# Altium PCB PCB.PcbDoc
Units mm, origin at the board's own origin, x right, y up, seen from the top; angles counter-clockwise.
Board outline 100.28 x 45.64 mm, 2 copper layers (Top Layer, Bottom Layer); 57 components, 71 nets, 224 pads, 17 vias.
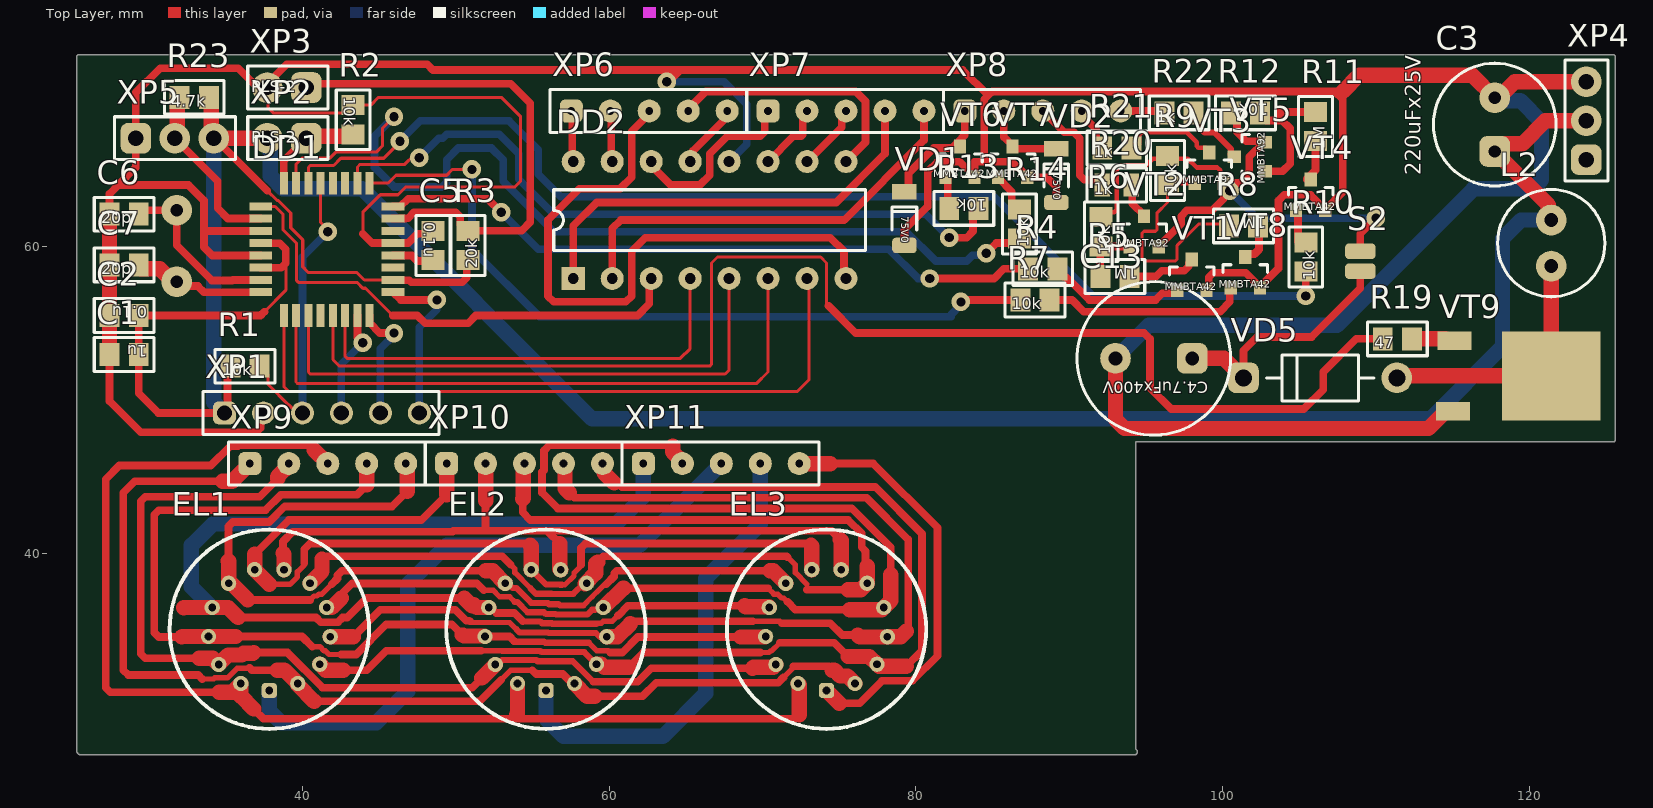
[diagram p0: Top Layer view]
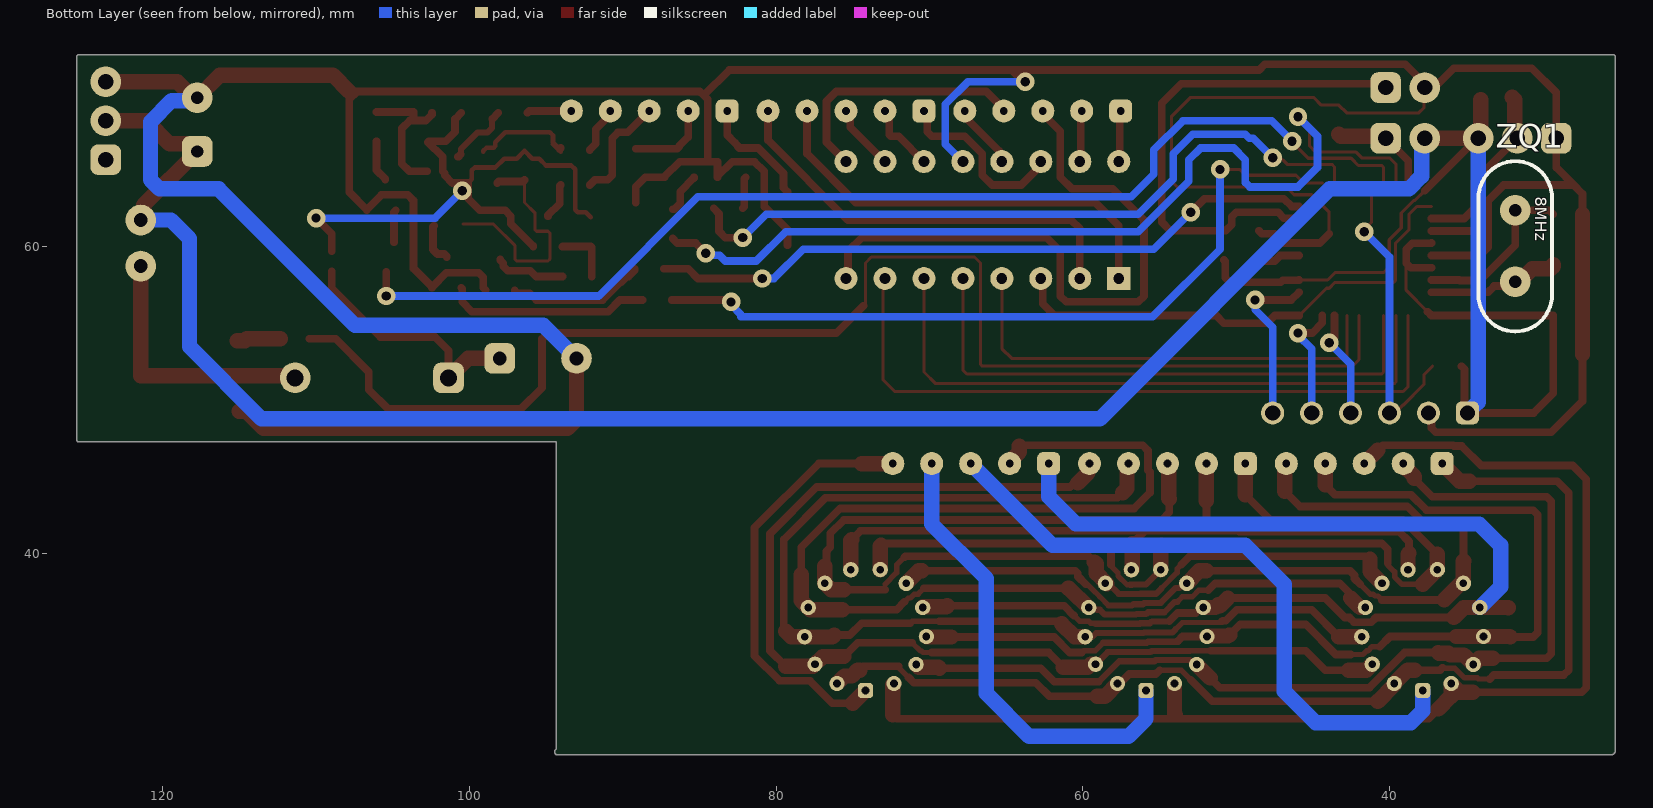
[diagram p1: Bottom Layer view, seen from below]

## Layer stack, top to bottom
Top Solder: solder mask 0.0102, Solder Resist, Dk 3.5
Top Layer: signal copper 0.0356
Dielectric 1: dielectric 0.32, FR-4, Dk 4.8
Bottom Layer: signal copper 0.0356
Bottom Solder: solder mask 0.0102, Solder Resist, Dk 3.5

## Board outline
25.345,26.986 cw(c25.4,27.07) 25.3,27.07 25.3,72.371 cw(c25.4,72.371) 25.3,72.381 cw(c25.4,72.39) 25.4,72.49 125.476,72.49 cw(c125.476,72.39) 125.576,72.39 125.576,47.371 cw(c125.476,47.371) 125.438,47.278 cw(c125.4,47.371) 125.4,47.271 94.334,47.271 94.334,27.224 cw(c94.234,27.051) 94.434,27.051 cw(c94.234,27.051) 94.234,26.851 25.527,26.87 cw(c25.527,27.07)

## Design rules (kind name [scope] priority, off if disabled: settings)
Clearance [All] p1: gap=0.254 ignorepadtopadclearanceinfootprint=FALSE except(0: Arc-Hole Track-Hole SMDPad-Hole THPad-Hole Via-Hole Fill-Hole Poly-Hole Region-Hole Text-Hole; 0.2: Arc-Arc Arc-Track Arc-SMDPad Arc-THPad Arc-Via Arc-Fill Arc-Poly Arc-Region Track-Track Track-SMDPad Track-THPad Track-Via Track-Fill Track-Poly Track-Region)
PolygonConnect [All] p1: connectstyle=Relief reliefconductorwidth=0.254 reliefentries=4 polygonreliefangle="90 Angle" airgapwidth=0.254
RoomDefinition Power [InComponentClass('Power')] p1: confinementstyle=ConfineIn formatcopy=TRUE lockcomponents=FALSE outline 108.712,47.371 125.603,47.371 125.603,72.263 108.712,72.263
RoomDefinition mcu [InComponentClass('mcu')] p2: confinementstyle=ConfineIn formatcopy=TRUE lockcomponents=FALSE outline 25.588,47.498 55.306,47.498 55.306,72.39 25.588,72.39
RoomDefinition Lamps [InComponentClass('Lamps')] p3: confinementstyle=ConfineIn formatcopy=TRUE lockcomponents=FALSE outline 25.344,27.051 82.042,27.051 82.042,47.244 25.344,47.244
RoomDefinition Lamp_C_Unit [InComponentClass('Lamp_C_Unit')] p4: confinementstyle=ConfineIn formatcopy=TRUE lockcomponents=FALSE outline 55.499,55.118 108.458,55.118 108.458,70.485 55.499,70.485
RoutingVias [All] p1: holewidth=0.711 width=1.27 viastyle="Through Hole" minholewidth=0.711 minwidth=1.27 maxholewidth=0.711 maxwidth=1.27
SolderMaskExpansion [All] p1: expansion=0.102 istentingtop=FALSE
Width [All] p1: maxlimit=1 minlimit=0.2 preferedwidth=0.5 minimp=50.000000 maximp=50.000000 favimp=50.000000
30 further rules are at their usual default settings.

## Classes and differential pairs
component class Power: C3 C13 L2 R19 S2 VD5 VT9 XP4
component class mcu: C1 C2 C5 C6 C7 DD1 R1 R2 R3 R23 XP1 XP2 XP3 XP5 ZQ1
component class Lamps: EL1 EL2 EL3 XP9 XP10 XP11
component class Lamp_C_Unit: DD2 R4 R5 R6 R7 R8 R9 R10 R11 R12 R13 R14 R20 R21 R22 VD1 VD2 VT1 VT2 VT3 VT4 VT5 VT6 VT7 VT8 XP6 XP7 XP8

## Components (designator, comment, footprint, x,y, rotation, side; value= is the part's Value field where it differs from the comment)
C1 "1u" CR2012-0805#1 28.382,52.959 r180 top
C2 "0.1u" CR2012-0805#1 28.382,55.499 r180 top
C3 "220uFx25V" C8x11.5 117.729,67.945 r90 top
C5 "0.1u" CR2012-0805#1 48.514,60.071 r270 top
C6 "20p" CR2012-0805#1 28.382,62.103 r0 top
C7 "20p" CR2012-0805#1 28.382,58.801 r0 top
C13 "C4.7uFx400V" C10x16 95.504,52.705 r180 top
DD1 "ATMEGA8-16AU" *QFP80P900X900X120-32N 41.59,59.817 r0 top
DD2 "K155ID1" DIP16 57.658,57.912 r90 top
EL1 "IN-16" IN-16 37.846,35.052 r0 top
EL2 "IN-16" IN-16 55.88,35.052 r0 top
EL3 "IN-16" IN-16 74.168,35.052 r0 top
L2 "1000uH" CHOKE1 121.412,61.722 r270 top
R1 "10k" CR2012-0805#1 36.261,52.197 r0 top
R2 "10k" CR2012-0805#1 43.307,68.26 r270 top
R3 "20k" CR2012-0805#1 50.8,60.071 r90 top
R4 "10k" CR2012-0805#1 88.265,58.547 r0 top
R5 "1M" CR2012-0805#1 92.964,58.039 r180 top
R6 "10k" CR2012-0805#1 92.075,60.96 r90 top
R7 "10k" CR2012-0805#1 87.757,56.515 r0 top
R8 "1M" CR2012-0805#1 101.346,61.341 r180 top
R9 "10k" CR2012-0805#1 96.393,64.958 r90 top
R10 "10k" CR2012-0805#1 105.41,59.309 r90 top
R11 "1M" CR2012-0805#1 106.045,67.818 r90 top
R12 "10k" CR2012-0805#1 101.473,68.707 r180 top
R13 "10k" CR2012-0805#1 83.119,62.484 r180 top
R14 "10k" CR2012-0805#1 86.741,61.468 r90 top
R19 "47" CR2012-0805#1 111.379,53.975 r0 top
R20 "1k" CR2012-0805#2 93.091,64.008 r0 top
R21 "1k" CR2012-0805#1 93.091,66.421 r0 top
R22 "1k" CR2012-0805#1 97.155,68.707 r0 top
R23 "4.7k" CR2012-0805#1 32.954,69.723 r0 top
S2 "JUMP2" JUMP 108.966,59.69 r270 top
VD1 "75V0" SOD-80 79.248,60.071 r90 top
VD2 "75V0" SOD-80 89.154,62.865 r90 top
VD5 "SF18" DO-41 111.346,51.435 r180 top
VT1 "MMBTA42" SOT-23 97.033,57.15 r0 top
VT2 "MMBTA92" SOT-23 93.919,59.976 r0 top
VT3 "MMBTA92" SOT-23 98.171,64.135 r0 top
VT4 "MMBTA42" SOT-23 104.78,62.357 r0 top
VT5 "MMBTA92" SOT-23 102.743,64.902 r90 top
VT6 "MMBTA42" SOT-23 81.92,64.516 r0 top
VT7 "MMBTA42" SOT-23 85.349,64.516 r0 top
VT8 "MMBTA42" SOT-23 100.523,57.309 r0 top
VT9 "FQD10N20" TO-252 115.112,53.862 r270 top
XP1 "ISP" PLS-6 34.925,49.149 r90 top
XP2 "PLS-2" PLS-2 40.259,67.056 r270 top
XP3 "PLS-2" PLS-2 40.259,70.358 r270 top
XP4 "PLS-3" PLS-3 123.698,65.659 r180 top
XP5 "PLS-3" PLS-3 29.144,67.056 r90 top
XP6 "PLS-5" PLS-5 57.531,68.834 r90 top
XP7 "PLS-5" PLS-5 70.358,68.834 r90 top
XP8 "PLS-5" PLS-5 83.185,68.834 r90 top
XP9 "PLS-5" PLS-5 36.576,45.847 r90 top
XP10 "PLS-5" PLS-5 49.403,45.847 r90 top
XP11 "PLS-5" PLS-5 62.23,45.847 r90 top
ZQ1 "8MHz" CRYSTAL 31.811,62.357 r270 bottom

## Footprints (in the part's own frame and the unit in brackets; to place one, negate y for a bottom-side part, rotate by r counter-clockwise, add the part's x,y. Pads: shape width x height; smd on the part's side, far side on the other; paste and mask are expansions set on the pad)
*QFP80P900X900X120-32N [mil]
  rect 58x20 smd: 1(-169.87,110) 2(-169.87,79) 3(-169.87,47) 4(-169.87,16) 5(-169.87,-16) 6(-169.87,-47) 7(-169.87,-79) 8(-169.87,-110) 17(169.87,-110) 18(169.87,-79) 19(169.87,-47) 20(169.87,-16) 21(169.87,16) 22(169.87,47) 23(169.87,79) 24(169.87,110)
  rect 20x58 smd: 9(-110,-169.87) 10(-79,-169.87) 11(-47,-169.87) 12(-16,-169.87) 13(16,-169.87) 14(47,-169.87) 15(79,-169.87) 16(110,-169.87) 25(110,169.87) 26(79,169.87) 27(47,169.87) 28(16,169.87) 29(-16,169.87) 30(-47,169.87) 31(-79,169.87) 32(-110,169.87)
C8x11.5 [mm]
  rrect50% 2x2 hole 0.8: 1(-1.75,0)
  round 2 hole 0.8: 2(1.75,0)
  silkscreen extent -4,-4 4,4
C10x16 [mm]
  rrect50% 2x2 hole 0.9: 1(-2.5,0)
  round 2 hole 0.9: 2(2.5,0)
  silkscreen extent -5,-5 5,5
CHOKE1 [mm]
  round 2 hole 0.9: 1(0,0) 2(3,0)
  silkscreen extent -2,-3.5 5,3.5
CR2012-0805#1 [mm]
  rect 1.3x1.5 smd: 1(-0.95,0) 2(0.95,0)
  silkscreen extent -1.95,-1.1 1.95,1.1
CR2012-0805#2 [mm]
  rect 1x1.5 smd: 1(-0.95,0) 2(0.95,0)
  silkscreen extent -1.95,-1.1 1.95,1.1
CRYSTAL [mm]
  round 2 hole 0.8: 1(0,0) 2(4.65,0)
  silkscreen extent -3.2,-2.4 7.9,2.4
DIP16 [mm]
  rect 1.5x1.5 hole 0.7: 1(0,0)
  round 1.5 hole 0.7: 2(0,-2.54) 3(0,-5.08) 4(0,-7.62) 5(0,-10.16) 6(0,-12.7) 7(0,-15.24) 8(0,-17.78) 9(7.62,-17.78) 10(7.62,-15.24) 11(7.62,-12.7) 12(7.62,-10.16) 13(7.62,-7.62) 14(7.62,-5.08) 15(7.62,-2.54) 16(7.62,0)
  silkscreen extent 1.84,-19.05 5.78,1.27
DO-41 [mm]
  round 2 hole 1.1: 1(0,0)
  rrect50% 2x2 hole 1.1: 2(10,0)
  silkscreen extent 1.5,-1.5 8.5,1.5
IN-16 [mm]
  rrect50% 1x1 hole 0.5: 1(0,-4)
  round 1 hole 0.5: 2(-1.857,-3.544) 3(-3.3,-2.3) 4(-3.97,-0.479) 5(-3.727,1.411) 6(-2.656,2.989) 7(-0.961,3.883) 8(0.954,3.871) 9(2.647,2.99) 10(3.735,1.41) 11(3.967,-0.493) 12(3.29,-2.284) 13(1.857,-3.542)
  silkscreen extent -6.5,-6.5 6.5,6.5
JUMP [mm]
  rrect50% 1x2 smd: 1(0,0) 2(1.3,0)
PLS-2 [mm]
  rrect50% 2x2 hole 1: 1(0,0)
  round 2 hole 1: 2(0,-2.54)
  silkscreen extent -1.4,-3.82 1.4,1.4
PLS-3 [mm]
  rrect50% 2x2 hole 1: 1(0,0)
  round 2 hole 1: 2(0,-2.54) 3(0,-5.08)
  silkscreen extent -1.4,-6.5 1.4,1.4
PLS-5 [mm]
  rrect50% 1.5x1.5 hole 0.5: 1(0,0)
  round 1.5 hole 0.5: 2(0,-2.54) 3(0,-5.08) 4(0,-7.62) 5(0,-10.16)
  silkscreen extent -1.4,-11.44 1.4,1.4
PLS-6 [mm]
  rrect50% 1.5x1.5 hole 1: 1(0,0)
  round 1.5 hole 1: 2(0,-2.54) 3(0,-5.08) 4(0,-7.62) 5(0,-10.16) 6(0,-12.7)
  silkscreen extent -1.4,-13.97 1.4,1.4
SOD-80 [mm]
  rrect50% 1x1.6 smd: 1(0,0)
  rect 1x1.6 smd: 2(3.5,0)
  silkscreen extent 1,-0.8 2.5,0.8
SOT-23 [mm]
  rect 0.8x0.9 smd: 1(0,0) 2(1.9,0) 3(0.95,2)
  silkscreen extent -0.5,1 2.4,1.5
TO-252 [mm]
  rect 1.2x2.2 smd: 1(0,0) 2(4.6,-0.1)
  rect 5.8x6.4 smd: 3(2.3,6.3)

## Part data
C1: library part C0805-1u-X7R
C2 C5: library part C0805-0.1u-X7R
C3: library part "C220uFx25V YAGEO SY", "SY025M0220A3F-0811"
C6 C7: library part C0805-20p-NPO
DD1: "AVR AVRВ® ATmega Microcontroller IC 8-Bit 16MHz 8KB _4K x 16_ FLASH 32-TQFP _7x7_", Package="TQFP-32 Microchip Technology", Availability=Unavailable, MF="Microchip Technology", MP=ATMEGA8-16AU, Price=None, SnapEDA_Link=https://www.snapeda.com/parts/ATMEGA8-16AU/Microchip/view-part/4246640/?ref=snap
L2: library part CHOKE_1
R1 R2 R4 R5 R6 R7 R8 R9 R10 R11 R12 R13 R14: library part R0805-10k-5%
R3: library part R0805-20k-5%
R19: library part R0805-47R-5%
R20 R21 R22: library part R0805-1k-5%
R23: library part R0805-4k7-5%
VD1 VD2: library part BZV55-C20V0
ZQ1: library part Crystal_8MHz

## Via types
v1: diameter 1.2, hole 0.6, Top Layer to Bottom Layer, 17 vias

## Nets (pads, with @x,y where several pads share a name; then routed paths per layer and width w, separated by ;. In a path a pad name is that pad's centre, name@x,y a point inside that pad or via, vN(x,y) a via of type N, cw(c..) or ccw(c..) an arc to the next point about the centre after c; other vN are vias at no path point)
1: DD1.1 DD2.3 | length 32.7
  Top Layer w0.2: DD1.1 38.227,62.611 38.735,62.103 38.735,61.087 39.624,60.198 39.624,57.775 39.741,57.658 43.561,57.658 43.942,57.277 44.119,57.277 45.897,55.499
  Top Layer w0.5: 45.897,55.499 47.498,55.499 48.006,54.991 50.8,54.991 51.308,55.499 61.849,55.499 62.611,56.261 62.611,57.785 DD2.3
2: DD1.10 DD2.6 | length 41.6
  Top Layer w0.2: DD1.10 39.583,51.171 39.701,51.054 69.596,51.054 70.358,51.816 DD2.6
4: DD1.9 DD2.7 | length 46
  Top Layer w0.2: DD1.9 38.796,50.866 39.116,50.546 72.263,50.546 73.025,51.308 73.025,57.785 DD2.7
8: DD1.14 DD2.4 | length 30
  Top Layer w0.2: DD1.14 42.784,52.847 42.926,52.705 64.643,52.705 65.278,53.34 DD2.4
+5V: C1.1 C2.1 C3.1 DD1.4 DD1.6 DD1.18 L2.1 R1.1 R3.1 R23.2 XP1.1 XP2.2 XP4.2 XP5.3 | length 196.2
  Top Layer w0.2: 37.526,55.753 38.923,57.15 38.923,58.916 ; 37.719,63.627 38.354,62.992 38.429,62.992 39.243,62.178 39.243,61.214 40.024,60.433 40.024,58.673 40.404,58.293 43.561,58.293 44.044,57.81 DD1.18
  Top Layer w0.5: R23.2 34.054,69.573 34.064,69.563 34.064,67.216 34.13,67.216 34.29,67.056 37.719,63.627 ; R1.1 35.118,52.004 35.118,49.342 XP1.1 30.607,49.149 29.332,50.424 C1.1 C2.1 37.272,55.499 37.526,55.753 ; DD1.6 38.63,58.623 38.923,58.916 38.923,59.817 38.521,60.219 37.279,60.219 DD1.4 ; DD1.18 45.909,57.806 46.969,57.806 47.117,57.658 50.419,57.658 50.712,57.951 50.712,59.033 R3.1
  Top Layer w1: R23.2@34.054,69.573 34.054,67.226 34.064,67.216 XP5.3 34.29,67.056 XP2.2 ; L2.1 121.221,61.913 121.221,62.703 C3.1 118.229,66.695 119.527,66.695 121.031,68.199 XP4.2
  Bottom Layer w1: XP5.3 34.224,49.85 XP1.1 ; XP2.2 37.91,66.865 37.91,64.579 38.735,63.754 43.907,63.754 58.893,48.768 113.538,48.768 118.237,53.467 118.237,60.516 119.443,61.722 L2.1
+180V: R6.2 R9.2 R12.2 S2.1 VT2.2 VT3.2 VT5.2 | length 40.1
  Top Layer w0.3: R6.2 92.395,62.23 92.915,62.23 93.091,62.406 93.091,65.024 93.345,65.278 94.996,65.278 95.446,65.728 95.893,65.728 96.393,66.228 96.893,65.728 97.721,65.728 98.298,65.151 99.646,65.151 99.822,64.975 99.822,64.384 VT3.2
  Top Layer w0.5: VT2.2 95.819,60.026 97.282,61.489 97.282,61.976 97.663,62.357 99.314,62.357 100.071,63.114 100.071,63.627 VT3.2 101.092,64.135 101.6,64.643 101.6,64.77 101.727,64.897 101.727,65.836 102.693,66.802 102.636,66.859 101.543,66.859 100.923,67.479 100.923,68.307 R12.2 ; S2.1 108.966,60.833 v1(109.982,61.849)
  Bottom Layer w0.5: v1(100.457,63.627) 102.235,61.849 v1(109.982,61.849)
A_0: R20.1 XP8.3 | length 7.3
  Top Layer w0.5: XP8.3 89.662,67.437 90.297,67.437 90.678,67.056 90.678,64.643 90.971,64.35 91.799,64.35 R20.1
A_0_0: EL1.1 XP11.3 | length 42.2
  Bottom Layer w1: EL1.1 37.846,29.718 38.608,28.956 44.831,28.956 46.863,30.988 46.863,37.973 49.403,40.513 61.976,40.513 XP11.3
A_1: R21.1 XP8.4 | length 3.1
  Top Layer w0.5: XP8.4 90.805,68.585 91.741,67.649 91.741,66.694 R21.1@92.141,66.294
A_1_0: EL2.1 XP11.4 | length 30.3
  Bottom Layer w1: EL2.1 55.88,29.21 57.023,28.067 63.5,28.067 66.294,30.861 66.294,38.354 69.85,41.91 XP11.4
A_2: R22.1 XP8.5 | length 2.9
  Top Layer w0.5: XP8.5 96.078,68.834 R22.1
A_2_0: EL3.1 XP11.5 | length 28
  Top Layer w0.5: 74.422,45.847 77.216,45.847 81.407,41.656 81.407,33.327 79.769,31.689 77.79,31.689 76.327,30.226 74.994,30.226
  Top Layer w1: XP11.5 74.422,45.847 ; EL3.1@74.231,31.052 EL3.1 74.994,30.226
DS_0: DD1.2 R23.1 XP5.2 | length 11.6
  Top Layer w0.5: XP5.2 34.478,64.262 34.478,62.484 35.138,61.824 DD1.2
  Top Layer w1: XP5.2 31.854,67.226 31.854,69.573 R23.1
L_0: DD2.16 XP6.1 | length 3.4
  Top Layer w0.5: XP6.1 57.594,68.77 57.594,65.596 DD2.16
L_0_0: EL1.13 EL2.13 EL3.13 XP9.1 | length 72.7
  Top Layer w0.2: 72.009,32.549 72.009,32.639
  Top Layer w0.35: 33.478,31.8 34.215,31.8 34.292,31.877 35.12,31.877 35.741,32.498 36.418,32.498 36.451,32.531 36.557,32.531 ; 52.959,31.75 53.594,32.385 54.991,32.385 ; 71.361,31.901 72.009,32.549
  Top Layer w0.5: 33.478,31.8 33.21,32.068 28.638,32.068 28.321,32.385 28.321,43.942 29.083,44.704 34.798,44.704 ; 36.557,32.531 36.703,32.385 38.354,32.385 ; 40.767,30.353 51.562,30.353 52.959,31.75 ; 54.991,32.385 55.245,32.131 56.981,32.131 57.602,31.51 EL2.13 ; 59.055,30.678 62.174,30.678 63.058,31.562 71.022,31.562 71.361,31.901 ; 72.009,32.639 74.295,32.639 74.549,32.385
  Top Layer w1: 34.798,44.704 35.433,44.704 XP9.1 ; 38.354,32.385 38.828,32.385 EL1.13 39.703,31.417 40.767,30.353 ; EL2.13 58.569,30.678 59.055,30.678 ; 74.549,32.385 74.679,32.385 75.06,32.004 75.531,32.004 EL3.13
L_1: DD2.15 XP6.2 | length 3.4
  Top Layer w0.5: XP6.2 60.134,68.77 60.134,65.596 DD2.15
L_1_0: EL1.2 EL2.2 EL3.2 XP9.3 | length 81.1
  Top Layer w0.5: 34.592,30.94 27.471,30.94 27.178,31.233 27.178,44.831 28.067,45.72 34.036,45.72 35.306,46.99 35.802,46.99 35.859,47.047 40.456,47.047 40.767,46.736 ; 36.83,29.845 37.465,29.21 53.721,29.21 ; 53.975,29.464 53.721,29.21 ; 72.39,29.464 72.136,29.21 53.721,29.21
  Top Layer w1: 34.592,30.94 35.421,30.94 EL1.2 35.989,30.686 36.83,29.845 ; 40.767,46.736 XP9.3 ; 53.975,29.464 54.023,29.512 EL2.2 ; EL3.2 72.39,31.429 72.39,29.464
L_2: DD2.8 XP6.3 | length 41.7
  Top Layer w0.5: XP6.3 62.611,68.645 61.468,67.502 61.468,64.516 60.706,63.754 58.039,63.754 56.007,61.722 56.007,56.769 56.388,56.388 61.087,56.388 61.468,56.769 61.468,59.69 62.357,60.579 74.422,60.579 75.311,59.69 75.311,58.039 DD2.8 DD2.8@75.565,58.039
L_2_0: EL1.9 EL2.9 EL3.9 XP10.3 | length 71
  Top Layer w0.2: 72.898,37.628 72.898,37.973
  Top Layer w0.35: 53.594,39.243 53.848,38.989 53.848,38.735 54.864,37.719 ; 71.628,39.751 72.136,39.243 72.136,38.735 72.898,37.973
  Top Layer w0.4: 54.864,37.719 55.223,37.36 56.245,37.36 56.257,37.347 57.67,37.347 58.365,38.042 EL2.9@58.457,38.042
  Top Layer w0.5: 41.275,39.624 41.463,39.812 53.025,39.812 53.594,39.243 ; 54.356,43.561 54.356,42.672 54.864,42.164 75.591,42.164 76.454,41.301 76.454,40.386 76.708,40.132 76.708,39.27 76.815,39.162 ; 59.245,39.433 59.624,39.812 71.567,39.812 71.628,39.751 ; 72.898,37.628 75.572,37.628
  Top Layer w1: EL1.9 41.275,38.824 41.275,39.624 ; 54.356,43.561 54.392,43.597 54.392,45.756 XP10.3 ; EL2.9@58.424,38.01 58.457,38.042 59.118,38.704 59.118,39.306 59.245,39.433 ; 75.572,37.628 76.4,37.628 EL3.9 76.815,39.162
L_3: DD2.9 XP6.4 | length 16.9
  Top Layer w0.5: XP6.4 65.151,68.961 66.294,70.104 76.073,70.104 76.708,69.469 76.708,66.802 DD2.9
L_3_0: EL1.4 EL2.4 EL3.4 XP9.4 | length 66.1
  Top Layer w0.2: 59.944,33.655 60.071,33.528
  Top Layer w0.35: 40.64,33.909 41.148,33.909 41.414,33.643 41.498,33.643 41.74,33.401 42.545,33.401 ; 58.674,34.163 59.182,33.655 59.944,33.655
  Top Layer w0.4: 53.793,34.235 55.757,34.235 55.829,34.163 58.674,34.163
  Top Layer w0.5: 32.131,34.544 30.646,34.544 30.353,34.837 30.353,42.506 30.646,42.799 37.592,42.799 38.608,43.815 43.561,43.815 44.196,44.45 ; 35.658,34.573 39.976,34.573 40.64,33.909 ; 42.545,33.401 43.508,33.401 45.466,35.359 49.731,35.359 50.419,34.671 ; EL2.4 53.505,34.573 53.793,34.285 ; 60.071,33.528 60.853,33.528 61.869,34.544 68.58,34.544
  Top Layer w1: 32.131,34.544 32.16,34.573 EL1.4 35.658,34.573 ; 44.196,44.45 XP9.4 ; 50.419,34.671 50.472,34.671 50.533,34.61 51.872,34.61 EL2.4 ; 68.58,34.544 EL3.4@70.161,34.544
L_4: DD2.13 XP6.5 | length 4.3
  Top Layer w0.5: DD2.13 65.469,65.723 65.469,66.231 67.691,68.453 XP6.5
L_4_0: EL1.6 EL2.6 EL3.6 XP9.5 | length 59
  Top Layer w0.2: 59.817,37.899 59.817,37.973
  Top Layer w0.35: 40.513,36.957 40.767,37.211 40.958,37.211 41.084,37.337 41.274,37.337 41.91,37.973 ; 58.32,36.603 58.884,37.167 58.89,37.167 59.402,37.68 59.402,37.685 59.717,38 60.325,38.608
  Top Layer w0.4: EL2.6 53.387,38.041 53.687,37.741 53.943,37.741 54.924,36.76 55.996,36.76 56.075,36.681 56.705,36.681 56.784,36.603 58.32,36.603
  Top Layer w0.5: 35.179,39.497 35.179,41.744 35.472,42.037 37.846,42.037 38.862,43.053 45.847,43.053 46.832,44.038 ; 36.449,36.957 40.513,36.957 ; 41.91,37.973 42.291,38.354 42.291,38.569 42.584,38.862 51.943,38.862 ; 59.817,37.973 60.325,38.481 60.325,38.696 60.491,38.862 70.485,38.862
  Top Layer w1: 35.179,39.497 35.19,39.486 EL1.6 35.365,38.041 36.449,36.957 ; XP9.5 46.832,45.751 46.832,44.038 ; 51.943,38.862 52.403,38.862 EL2.6 ; 70.485,38.862 70.691,38.862 EL3.6
L_5: DD2.14 XP7.1 | length 11.9
  Top Layer w0.5: DD2.14 62.738,65.278 64.008,64.008 65.913,64.008 66.548,64.643 66.548,66.04 67.691,67.183 69.85,67.183 70.143,67.476 70.143,68.619 XP7.1
L_5_0: EL1.7 EL2.7 EL3.7 XP10.1 | length 61.5
  Top Layer w0.2: 40.132,39.124 40.132,39.37 ; 58.166,39.179 58.166,39.243
  Top Layer w0.35: 37.846,37.973 39.186,37.973 39.675,38.461 39.675,38.786 40.132,39.243 ; 56.935,37.947 57.124,37.947 57.709,38.532 57.709,38.721 58.166,39.179
  Top Layer w0.4: EL2.7@55.054,38.935 55.054,38.8 55.894,37.96 56.79,37.96 56.803,37.947 56.935,37.947
  Top Layer w0.5: 36.885,39.933 39.116,42.164 47.752,42.164 49.403,43.815 ; 40.132,39.37 40.132,40.259 40.513,40.64 54.737,40.64 54.864,40.513 ; EL2.7 EL2.7@55.054,38.935 ; 58.166,39.243 58.166,40.347 58.459,40.64 73.025,40.64 73.152,40.513
  Top Layer w1: 36.885,39.933 EL1.7 37.846,37.974 37.846,37.973 ; 49.403,43.815 XP10.1 ; 54.864,40.513 54.919,40.458 EL2.7 ; 73.152,40.513 73.207,40.458 EL3.7
L_6: DD2.11 XP7.2 | length 4.7
  Top Layer w0.5: DD2.11 72.009,67.183 72.517,67.183 72.611,67.277 72.611,68.547 XP7.2
L_6_0: EL1.8 EL2.8 EL3.8 XP10.2 | length 48
  Top Layer w0.5: 38.735,40.005 38.735,40.767 39.37,41.402 49.787,41.402 49.848,41.463 51.816,41.463 ; 51.943,43.434 51.943,41.59 51.816,41.463 ; 56.769,40.64 56.007,41.402 ; 75.057,40.894 74.488,41.463 56.172,41.463 56.111,41.402 56.007,41.402 ; 51.816,41.463 55.946,41.463 56.007,41.402
  Top Layer w1: 38.735,40.005 38.8,39.94 EL1.8 ; 51.943,43.434 XP10.2 ; 56.769,40.64 56.769,38.988 EL2.8 ; 75.057,40.894 75.122,40.829 EL3.8
L_7: DD2.10 XP7.3 | length 4.4
  Top Layer w0.5: DD2.10 75.151,67.785 75.151,68.547 XP7.3
L_7_0: EL1.3 EL2.3 EL3.3 XP9.2 | length 65.5
  Top Layer w0.4: EL2.3 52.742,32.752 53.025,33.035 55.26,33.035 55.332,32.963 57.628,32.963 58.963,31.628
  Top Layer w0.5: 33.274,33.147 29.757,33.147 29.464,33.44 29.464,43.395 29.757,43.688 37.211,43.688 38.394,44.871 ; 36.83,33.528 39.029,33.528 41.315,31.242 51.07,31.242 51.697,31.869 ; 58.963,31.628 61.854,31.628 62.738,32.512 69.342,32.512
  Top Layer w1: 33.274,33.147 34.151,33.147 EL1.3 35.167,33.373 36.055,33.373 36.164,33.481 36.783,33.481 36.83,33.528 ; 38.394,44.871 38.394,44.99 39.116,45.712 XP9.2 ; 51.697,31.869 EL2.3 ; 69.342,32.512 69.408,32.578 70.694,32.578 EL3.3
L_8: DD2.1 XP7.4 | length 28.5
  Top Layer w0.5: DD2.1 57.658,61.341 59.182,62.865 74.803,62.865 77.978,66.04 XP7.4
L_8_0: EL1.11 EL2.11 EL3.11 XP10.4 | length 71
  Top Layer w0.2: 71.12,35.56 71.247,35.433 ; 79.375,34.925 79.502,35.052
  Top Layer w0.35: 50.927,35.56 51.002,35.485 53.512,35.485 53.952,35.045 ; 69.342,35.56 71.12,35.56
  Top Layer w0.4: 53.952,35.045 54.162,34.835 56.006,34.835 56.038,34.803 59.136,34.803 EL2.11@59.394,34.544
  Top Layer w0.5: 43.307,34.544 45.085,36.322 49.964,36.322 50.678,35.609 50.878,35.609 50.927,35.56 ; 57.404,43.942 57.723,43.623 76.773,43.623 79.502,40.894 79.502,35.052 ; 61.341,35.433 61.468,35.56 69.342,35.56 ; 71.247,35.433 74.422,35.433 75.184,34.671 76.2,34.671
  Top Layer w1: EL1.11 43.292,34.559 43.307,34.544 ; XP10.4 57.119,45.751 57.119,44.227 57.404,43.942 ; EL2.11 60.541,34.559 61.378,35.396 ; 76.2,34.671 76.327,34.544 78.12,34.544 EL3.11 79.009,34.559 79.375,34.925
L_9: DD2.2 XP7.5 | length 27.9
  Top Layer w0.5: DD2.2 60.198,61.175 60.745,61.722 75.311,61.722 80.518,66.929 XP7.5
L_9_0: EL1.12 EL2.12 EL3.12 XP10.5 | length 72.6
  Top Layer w0.35: 51.664,33.655 52.878,33.655 ; 69.85,33.528 70.407,33.528 70.506,33.627 70.584,33.627 71.12,34.163
  Top Layer w0.4: 53.005,33.635 55.509,33.635 55.581,33.563 58.375,33.563 EL2.12 ; EL2.12@59.487,32.768 59.677,32.578
  Top Layer w0.5: 42.672,32.385 44.196,32.385 45.466,33.655 51.664,33.655 ; 60.325,44.577 60.579,44.577 60.833,44.323 77.343,44.323 80.391,41.275 80.391,33.655 79.375,32.639 ; 61.28,32.578 62.23,33.528 69.85,33.528 ; 71.12,34.163 74.676,34.163 75.565,33.274
  Top Layer w1: EL1.12 41.519,32.385 42.672,32.385 ; EL2.12 EL2.12@59.487,32.768 ; XP10.5 59.659,45.751 59.659,45.243 60.325,44.577 ; 59.677,32.578 61.28,32.578 ; 75.565,33.274 76.952,33.274 EL3.12 77.587,32.639 79.375,32.639
L_point: DD1.26 R13.1 | length 47.3
  Top Layer w0.2: DD1.26 43.597,65.187 43.762,65.352 46.683,65.352 v1@47.244,65.913
  Top Layer w0.5: v1(82.169,60.579) 83.312,60.579 83.717,60.984 83.717,62.132 R13.1
  Bottom Layer w0.5: v1(47.625,65.786) 48.895,67.056 49.149,67.056 49.403,67.31 52.832,67.31 54.102,66.04 54.102,64.389 56.388,62.103 80.645,62.103 v1(82.169,60.579)
Lamp_0: DD1.24 R4.1 | length 44
  Top Layer w0.5: DD1.24 46.387,62.611 46.895,63.119 52.07,63.119 v1(52.959,62.23) ; v1(80.899,57.912) 85.09,57.912 85.725,58.547 R4.1
  Bottom Layer w0.5: v1(52.959,62.23) 55.372,59.817 78.232,59.817 80.137,57.912 v1(80.899,57.912)
Lamp_1: DD1.25 R7.1 | length 50.7
  Top Layer w0.2: DD1.25 45.59,64.132 46.101,64.643 49.403,64.643 49.784,65.024 v1(51.054,65.024)
  Top Layer w0.5: v1@82.804,56.261 v1(82.931,56.388) 83.058,56.515 R7.1
  Bottom Layer w0.5: v1(51.054,65.024) 51.054,59.817 55.46,55.411 82.296,55.411 82.296,55.564 82.931,56.199 v1(82.931,56.388)
Lamp_2: DD1.30 R10.1 | length 74.7
  Top Layer w0.2: DD1.30 40.396,65.161 40.513,65.278 42.037,65.278 42.511,65.752 45.305,65.752 46.355,66.802 v1(46.355,66.865) v1@46.355,66.929
  Top Layer w0.5: v1(105.41,56.769) R10.1
  Bottom Layer w0.5: v1(46.355,66.865) 47.688,68.199 53.467,68.199 55.372,66.294 55.372,64.709 56.835,63.246 85.09,63.246 91.567,56.769 v1(105.41,56.769)
Left_P: VD1.2 VT6.3 XP8.1 | length 7.6
  Top Layer w0.5: VD1.2 79.264,63.571 79.514,63.821 79.514,64.782 81.153,66.421 82.389,66.421 82.484,66.516 82.484,66.566 82.677,66.759 83.185,67.267 XP8.1
Left_P_0: EL1.5 EL2.5 EL3.5 XP11.1 | length 77.5
  Top Layer w0.35: 59.169,35.403 59.2,35.433 59.484,35.433 59.611,35.56 60.198,35.56 60.579,35.941
  Top Layer w0.4: 54.356,35.56 55.499,35.56 55.624,35.435 56.254,35.435 56.287,35.403 59.169,35.403
  Top Layer w0.5: 35.814,35.814 40.886,35.814 41.188,35.512 42.317,35.512 42.619,35.814 42.926,35.814 44.196,37.084 50.546,37.084 ; 51.071,36.559 51.272,36.559 ; 52.641,36.11 53.806,36.11 54.356,35.56 ; 60.579,35.941 61.214,36.576 68.834,36.576
  Top Layer w1: 32.258,36.449 32.272,36.463 EL1.5 35.165,36.463 35.814,35.814 ; 50.546,37.084 51.071,36.559 ; 51.172,36.659 51.272,36.559 51.367,36.463 EL2.5 ; 68.834,36.576 68.9,36.51 70.394,36.51 EL3.5
  Bottom Layer w1: EL1.5 32.766,37.816 32.766,40.513 34.163,41.91 60.452,41.91 62.23,43.688 XP11.1
NetC5_2: C5.2 DD1.20 | length 2.8
  Top Layer w0.5: DD1.20 47.142,59.411 47.498,59.055 48.448,59.055 C5.2
NetC6_2: C6.2 DD1.7 ZQ1.1 | length 11.3
  Top Layer w0.5: C6.2 29.586,62.357 ZQ1.1 31.811,60.071 34.097,57.785 35.432,57.785 35.457,57.81 DD1.7
NetC7_2: C7.2 DD1.8 ZQ1.2 | length 8.7
  Top Layer w0.5: ZQ1.2 32.098,57.42 33.192,57.42 33.589,57.023 DD1.8
  Top Layer w1: C7.2 29.332,58.701 29.482,58.551 30.696,58.551 31.54,57.707 ZQ1.2
NetC13_1: C13.1 S2.2 VD5.2 | length 16.1
  Top Layer w0.5: VD5.2 101.346,53.213 102.235,54.102 105.791,54.102 108.966,57.277 S2.2
  Top Layer w1: C13.1@97.973,52.705 100.076,52.705 VD5.2
NetDD1_15: DD1.15 XP1.4 | length 7.4
  Top Layer w0.5: XP1.4 XP1.4@42.545,49.42 ; DD1.15@43.601,55.498 DD1.15 43.597,54.066 v1(43.942,53.721)
  Bottom Layer w0.5: XP1.4 42.545,52.324 v1(43.942,53.721)
NetDD1_16: DD1.16 XP1.5 | length 7.9
  Top Layer w0.5: DD1.16 44.384,55.02 45.048,54.356 v1(45.974,54.356)
  Bottom Layer w0.5: XP1.5 45.085,53.336 45.974,54.225 v1(45.974,54.356)
NetDD1_17: DD1.17 XP1.6 | length 10.9
  Top Layer w0.5: DD1.17 46.413,56.515 v1(48.768,56.515)
  Bottom Layer w0.5: XP1.6 47.625,54.737 48.768,55.88 v1(48.768,56.515)
NetDD1_23: DD1.23 R3.2 XP3.1 | length 33.2
  Top Layer w0.5: XP3.1 40.513,70.612 53.594,70.612 54.864,69.342 54.864,61.595 54.29,61.021 R3.2 50.7,61.021 50.3,61.421 50.3,61.937 50.007,62.23 47.269,62.23 46.888,61.849 46.736,61.849 46.715,61.828 45.909,61.828 DD1.23
NetDD1_29: DD1.29 R1.2 XP1.3 | length 20.3
  Top Layer w0.2: R1.2 37.761,51.647 37.761,51.012 39.116,49.657 39.145,49.657 39.653,49.149 XP1.3 ; DD1.29 41.184,61.577 41.656,61.105 v1(41.656,60.96)
  Bottom Layer w0.5: XP1.3 40.005,59.309 v1(41.656,60.96)
NetDD1_32: DD1.32 R2.2 XP2.1 | length 6.7
  Top Layer w0.5: DD1.32 38.796,65.593 XP2.1
  Top Layer w1: XP2.1 40.386,67.183 43.18,67.183 R2.2
NetL2_2: L2.2 VD5.1 VT9.3 | length 17.3
  Top Layer w1: VD5.1 111.473,51.562 VT9.3 L2.2
NetR4_2: R4.2 VT1.1 | length 9
  Top Layer w0.5: R4.2 89.215,58.447 89.615,58.047 89.715,58.047 90.104,57.658 90.145,57.658 91.288,56.515 95.631,56.515 96.066,56.95 96.883,56.95 97.033,57.1 VT1.1
NetR5_1: R5.1 VT1.3 | length 4.7
  Top Layer w0.5: R5.1 95.631,58.039 96.012,58.42 97.497,58.42 97.79,58.713 97.79,58.907 97.983,59.1 VT1.3
NetR5_2: R5.2 R6.1 VT2.1 | length 3.9
  Top Layer w0.5: R5.2 92.014,59.949 R6.1 92.092,59.993 93.902,59.993 VT2.1 VT2.1@93.916,59.973
NetR7_2: R7.2 VT8.1 | length 13.3
  Top Layer w0.5: R7.2 90.17,56.515 90.932,55.753 99.822,55.753 100.457,56.388 100.457,57.243 VT8.1
NetR8_1: R8.1 VT8.3 | length 2.7
  Top Layer w0.5: VT8.3 101.473,59.359 101.623,59.509 102.069,59.509 102.362,59.802 102.362,61.275 R8.1
NetR8_2: R8.2 R9.1 VT3.1 | length 15.4
  Top Layer w0.2: R9.1@96.393,64.328 96.393,62.865 95.725,62.197 95.725,61.109 95.608,60.992 94.859,60.992 94.742,60.875 94.742,59.172 94.859,59.055 96.901,59.055 97.028,59.182 97.028,60.071 98.425,61.468 R8.2@100.396,61.468
  Top Layer w0.5: R9.1@96.393,64.328 96.49,64.231 98.075,64.231 VT3.1
NetR10_2: R10.2 VT4.1 | length 2.1
  Top Layer w0.5: VT4.1 104.902,62.235 R10.2@104.902,60.286
NetR11_1: R11.1 VT4.3 | length 2.7
  Top Layer w0.5: VT4.3@105.471,64.357 105.471,64.407 106.045,64.981 R11.1
NetR11_2: R11.2 R12.1 VT5.1 | length 9.6
  Top Layer w0.5: R12.1 102.423,68.607 102.823,68.207 103.632,68.207 ; VT5.1 103.891,64.902 104.394,65.405 104.394,67.691 103.878,68.207 103.632,68.207 ; R11.2 103.632,68.768 103.632,68.207
NetR13_2: R13.2 VT6.1 | length 2.1
  Top Layer w0.5: VT6.1@81.976,64.516 82.073,64.42 82.073,62.58 R13.2
NetR14_2: R14.2 VT7.1 | length 2.7
  Top Layer w0.5: VT7.1 85.349,64.466 86.241,63.574 86.241,62.818 86.641,62.418 R14.2
NetR19_2: R19.2 VT9.1 | length 2.8
  Top Layer w1: R19.2 114.499,53.975 114.612,53.862 VT9.1
NetR20_2: R20.2 VT2.3 | length 2.4
  Top Layer w0.5: R20.2 94.107,63.942 94.107,62.788 94.869,62.026 VT2.3
NetR21_2: R21.2 VT3.3 | length 7.1
  Top Layer w0.3: R21.2@94.041,66.167 R21.2@94.541,66.667 ; R21.2@94.168,66.421 94.541,66.794 94.541,67.236 94.742,67.437 97.663,67.437 98.298,66.802 98.298,66.548 98.411,66.435 98.871,66.435 99.075,66.232 VT3.3@99.075,66.182
  Top Layer w0.5: R21.2 R21.2@94.107,66.355
NetR22_2: R22.2 VT5.3 | length 4.3
  Top Layer w0.4: R22.2@98.505,68.307 98.505,67.738 98.806,67.437 99.441,67.437 100.543,66.335 VT5.3@100.543,66.002
  Top Layer w0.5: R22.2 R22.2@98.505,68.307 ; VT5.3@100.543,66.002 100.693,65.852 VT5.3
PWM_1: DD1.13 R19.1 | length 88.4
  Top Layer w0.2: DD1.13 41.996,52.619 42.418,52.197 66.558,52.197 66.675,52.314 66.675,58.928 67.056,59.309 73.787,59.309 74.168,58.928 74.168,56.261 74.295,56.134
  Top Layer w0.5: 74.295,56.134 76.073,54.356 94.869,54.356 95.25,53.975 95.25,50.8 96.647,49.403 105.283,49.403 106.553,50.673 106.553,51.816 108.712,53.975 R19.1
R_point: DD1.31 R14.1 | length 62.4
  Top Layer w0.2: DD1.31 39.583,65.364 39.975,65.756 41.783,65.756 42.179,66.152 44.816,66.152 45.212,66.548 45.212,67.691 v1(45.974,68.453)
  Top Layer w0.5: v1(84.582,59.563) 85.241,60.222 86.445,60.222 R14.1
  Bottom Layer w0.5: v1(45.974,68.453) 44.704,67.183 44.704,65.151 45.974,63.881 49.11,63.881 49.403,64.174 49.403,65.659 50.165,66.421 52.324,66.421 53.086,65.659 53.086,64.262 56.388,60.96 79.375,60.96 81.28,59.055 83.312,59.055 83.686,59.429 84.448,59.429 v1(84.582,59.563)
Right_P: VD2.2 VT7.3 XP8.2 | length 5.5
  Top Layer w0.5: XP8.2 85.725,67.14 86.299,66.566 VT7.3 ; VT7.3 86.449,66.365 VD2.2
Right_P_0: EL1.10 EL2.10 EL3.10 XP11.2 | length 79.8
  Top Layer w0.35: 51.816,37.592 52.435,37.592 52.862,37.166 53.512,37.166 53.848,36.83 ; 70.358,37.719 70.739,37.338 70.977,37.338 71.231,37.084 71.374,37.084 71.628,36.83
  Top Layer w0.4: 53.848,36.83 54.005,36.83 54.675,36.16 55.748,36.16 55.873,36.035 56.503,36.035 56.535,36.003 58.568,36.003 58.888,36.322 59.081,36.322
  Top Layer w0.5: 42.545,37.084 42.545,37.338 43.241,38.034 51.374,38.034 51.816,37.592 ; 60.96,37.719 70.358,37.719 ; 64.135,46.99 64.078,47.047 56.103,47.047 55.753,46.697 55.753,45.42 55.626,45.293 55.626,43.942 56.645,42.923 75.822,42.923 78.359,40.386 78.359,38.608 ; 71.628,36.83 72.136,36.322 75.684,36.322
  Top Layer w1: EL1.10 41.923,36.462 42.545,37.084 ; EL2.10 60.176,37.023 60.211,37.023 60.907,37.719 60.96,37.719 ; 64.135,46.99 64.135,46.617 64.77,45.982 XP11.2 ; 75.684,36.322 77.763,36.322 EL3.10 78.359,36.918 78.359,38.608
SGND: C1.2 C2.2 C3.2 C5.1 C6.1 C7.1 C13.2 DD1.3 DD1.5 DD1.21 DD2.12 R2.1 VD1.1 VD2.1 VT1.2 VT4.2 VT6.2 VT7.2 VT8.2 VT9.2 XP1.2 XP3.2 XP4.3 XP5.1 | length 311.6
  Top Layer w0.2: XP3.2 37.749,70.328 37.749,69.058 38.1,68.707 42.804,68.707 R2.1 44.455,69.21 44.968,69.723 52.963,69.723 54.231,68.455 54.229,68.453 54.229,64.262 53.848,63.881 46.736,63.881 46.228,63.373 45.085,63.373 43.942,62.23 43.942,60.833
  Top Layer w0.5: C1.2 27.432,49.911 29.464,47.879 36.981,47.879 37.274,48.172 37.274,48.958 XP1.2 ; C6.1 27.432,63.439 28.001,64.008 ; DD1.5 34.122,59.411 33.589,59.944 33.589,61.087 ; DD1.3 33.665,61.011 33.589,61.087 ; XP3.2@37.401,70.04 35.814,71.628 30.734,71.628 29.144,70.038 XP5.1 29.144,65.151 28.001,64.008 ; XP3.2 37.719,70.612 38.989,71.882 48.133,71.882 48.514,71.501 64.643,71.501 ; 43.942,60.833 44.552,60.223 DD1.21 45.909,60.227 46.892,60.227 47.498,60.833 48.326,60.833 C5.1 ; v1(63.754,70.739) 63.881,70.739 64.643,71.501 ; VD1.1 79.248,61.087 80.772,62.611 80.772,64.897 81.407,65.532 82.854,65.532 VT6.2@83.82,64.566 ; VT6.2 VT6.2@83.82,64.566 ; VD2.1 89.154,63.881 88.519,64.516 VT7.2 87.249,64.566 86.283,65.532 84.455,65.532 ; VT1.2 99.083,57.3 99.083,58 99.376,58.293 101.489,58.293 VT8.2@102.423,57.359 ; VT8.2 VT8.2@102.423,57.359 ; VT4.2 VT4.2@106.68,62.407 ; 107.823,70.104 107.315,70.104 ; 28.001,64.008 32.573,64.008 33.589,62.992 33.589,61.087 ; 64.643,71.501 83.058,71.501 84.709,69.85 ; VT6.2@83.82,64.566 83.82,65.532 84.455,65.532 ; 84.455,65.532 84.455,69.596 84.709,69.85 ; 84.709,69.85 84.963,70.104 107.315,70.104 ; VT8.2@102.423,57.359 103.632,58.568 103.632,62.992 104.013,63.373 105.714,63.373 VT4.2@106.68,62.407 ; VT4.2@106.68,62.407 107.823,63.55 107.823,69.596 107.315,70.104
  Top Layer w1: C1.2 C7.1 C6.1 ; C13.2 93.004,48.719 93.59,48.133 113.411,48.133 114.412,49.134 114.412,49.162 114.512,49.262 VT9.2 ; 107.823,70.104 108.888,71.169 116.254,71.169 C3.2 118,69.695 119.044,70.739 XP4.3
  Bottom Layer w0.5: v1(63.754,70.739) 67.483,70.739 68.961,69.261 68.961,66.675 DD2.12
  Bottom Layer w1: C13.2 95.163,54.864 107.442,54.864 116.332,63.754 120.191,63.754 120.777,64.34 120.777,68.121 119.395,69.504 117.92,69.504 C3.2
VCC_D: DD1.11 DD2.5 | length 37.2
  Top Layer w0.2: DD1.11 40.396,51.806 40.513,51.689 67.564,51.689 67.818,51.943 DD2.5
pads on no net: DD1.12 DD1.19 DD1.22 DD1.27 DD1.28 XP4.1

## Silkscreen, mask and mechanical layers (free items; w line width, h text height)
Mechanical 1:
  lines w0.2: 25.4,27.07 25.4,47.371 ; 25.4,72.371 25.4,47.371 ; 25.4,72.39 125.476,72.39 125.476,47.371 ; 94.234,27.178 94.234,47.371 ; 125.4,47.371 25.4,47.371
  lines w0.4: 25.527,27.07 94.234,27.051